# Altium PCB DIPSY_UL1K16.PcbDoc
Units mm, origin at the board's own origin, x right, y up, seen from the top; angles counter-clockwise.
Board outline 10.2 x 10.53 mm, 4 copper layers (L 01 (Top), L 02 GND, L 03 PWR, L 04 (Bot)), stack 0.813 mm thick; 8 components, 14 nets, 39 pads, 11 vias.
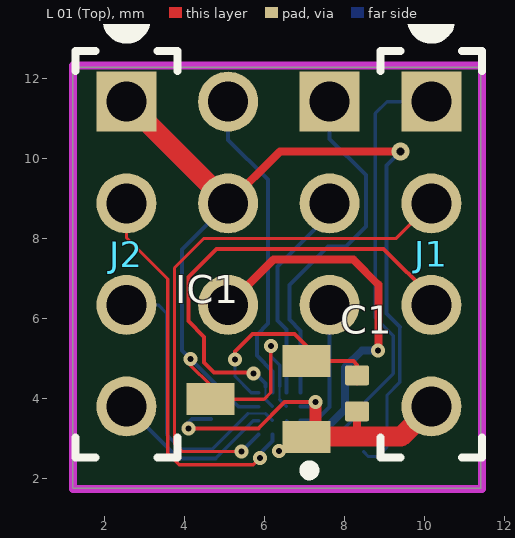
[diagram p0: L 01 (Top) view]
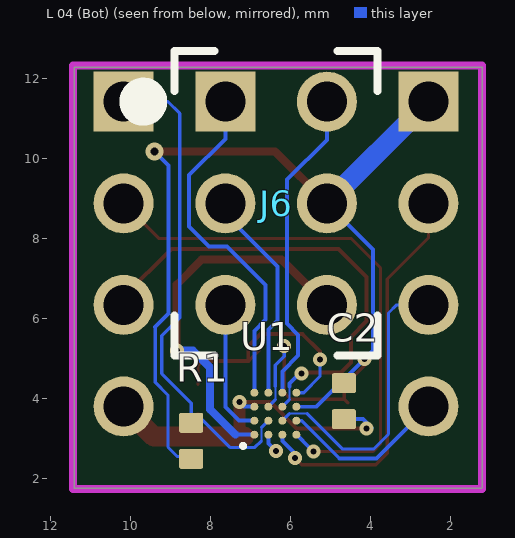
[diagram p1: L 04 (Bot) view, seen from below]
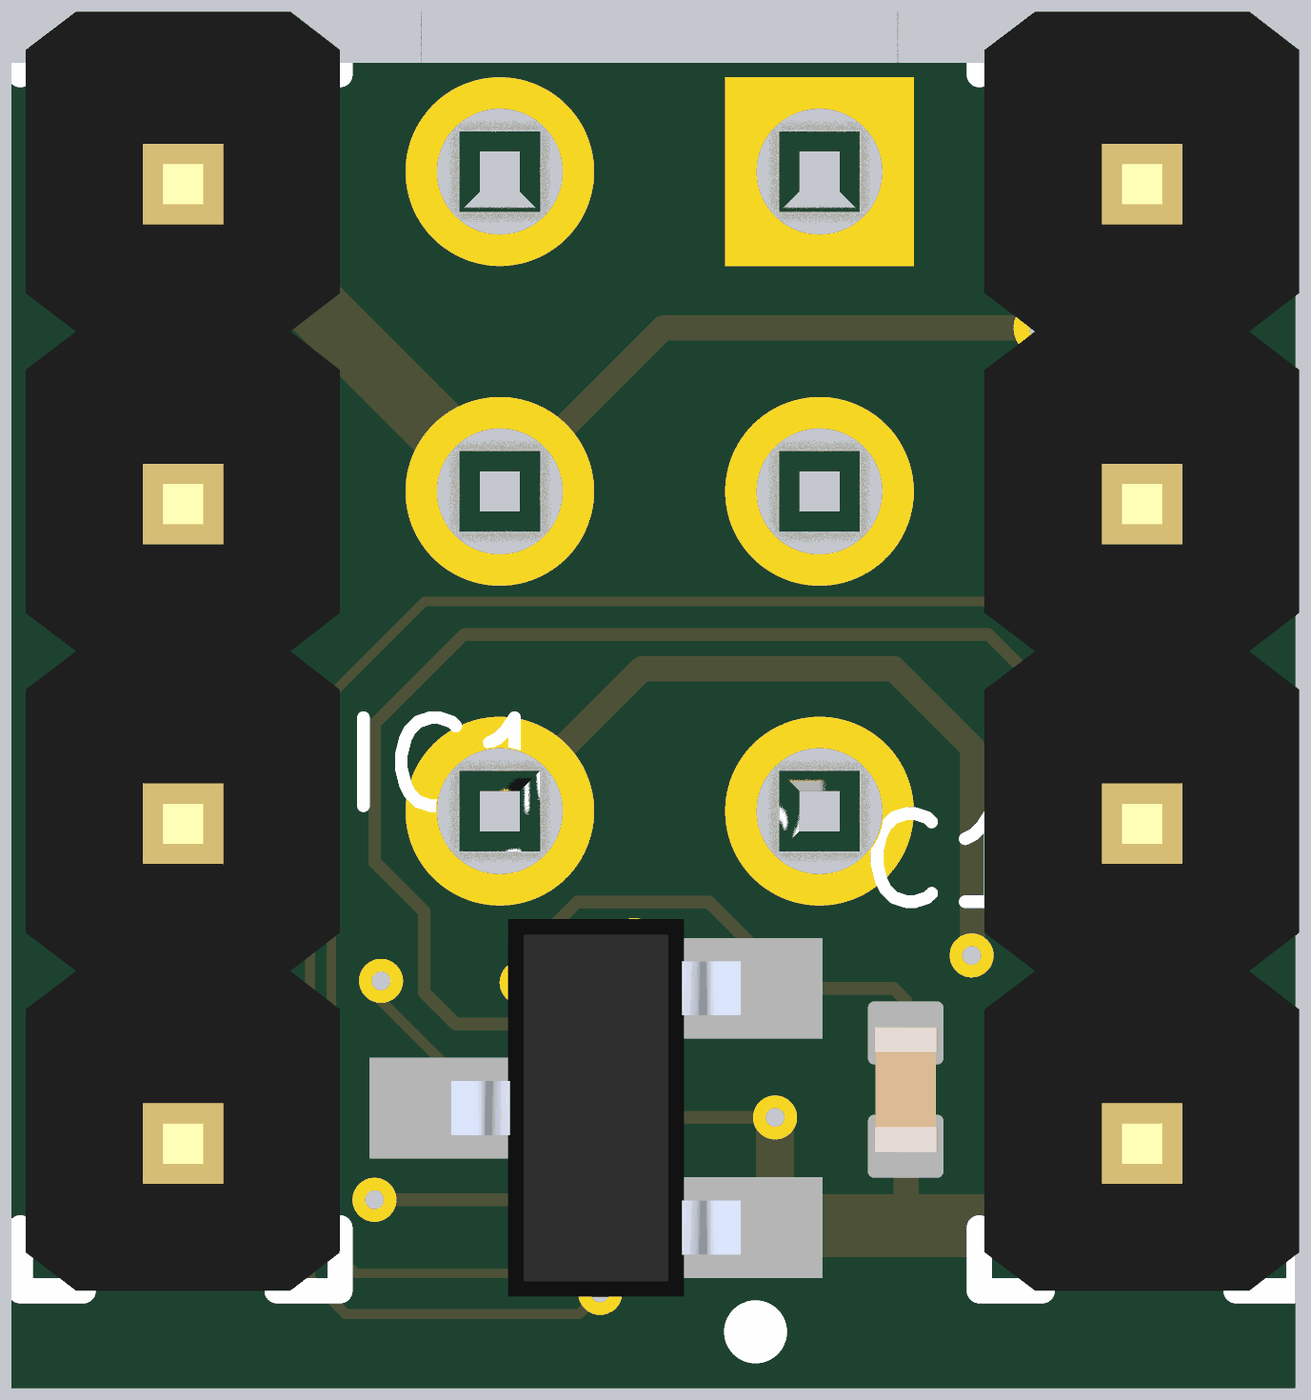
[diagram p2: 3D render of the assembled board from above, using the file's embedded part models]
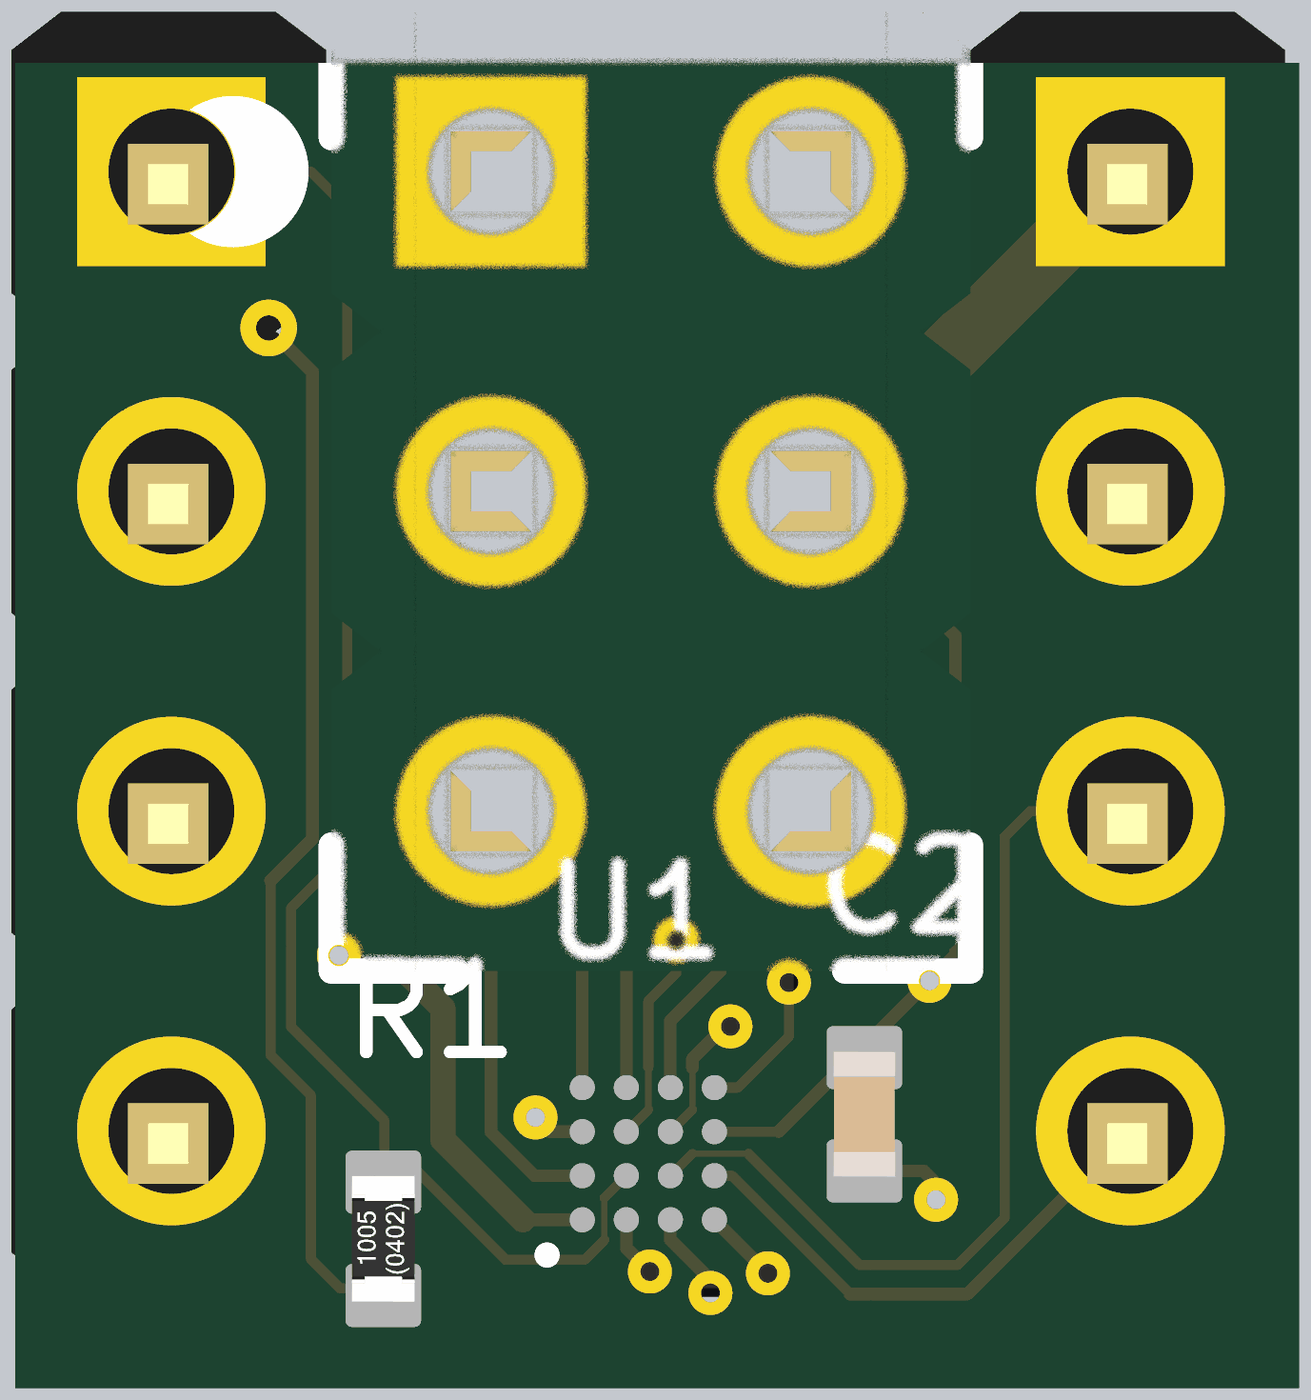
[diagram p3: 3D render of the assembled board from below, using the file's embedded part models]

## Layer stack, top to bottom
Top Solder: solder mask 0.0102, Solder Resist, Dk 3.5
L 01 (Top): signal copper 0.054
Dielectric1: core 0.254, FR-4, Dk 4.2
L 02 GND: signal copper 0.035
Dielectric2: prepreg 0.127, FR-4, Dk 4.2
L 03 PWR: signal copper 0.035
Dielectric5: core 0.254, FR-4, Dk 4.2
L 04 (Bot): signal copper 0.054
Bottom Solder: solder mask 0.0102, Solder Resist, Dk 3.5

## Board outline
1.2,1.766 11.4,1.766 11.4,12.295 1.2,12.295

## Design rules (kind name [scope] priority, off if disabled: settings)
Clearance Clearance_DiffPair [(InDifferentialPairClass('All Differential Pairs')) vs (InPolygon)] p1: gap=0.4
Clearance Clearance_PolyToPoly [InPoly vs InPoly] p2: gap=0.3
Clearance Clearance_Polygon [(InPolygon)] p3: gap=0.15
Clearance [All] p4: gap=0.05
ComponentClearance ComponentClearance_logo [(HasFootprint('LOGO PRINT') or HasFootprint('FIDU-DOT - small'))] p1: gap=-0.05 collisioncheckmode=3 verticalgap=-0.1 showdistances=FALSE
ComponentClearance [All] p2: gap=-0.05 collisioncheckmode=3 verticalgap=0.254 showdistances=FALSE
DiffPairsRouting [All] p1: maxlimit=1 minlimit=0.11 mostfreqgap=1 toplayer_maxgap=0.145 toplayer_prefgap=0.145 toplayer_minwidth=0.11 toplayer_maxwidth=0.381 toplayer_prefwidth=0.381 midlayer1_minwidth=0.11 midlayer1_maxwidth=0.381 midlayer1_prefwidth=0.381 midlayer6_maxgap=0.191 midlayer6_prefgap=0.19 midlayer6_minwidth=0.11 midlayer6_maxwidth=0.381 midlayer6_prefwidth=0.381 bottomlayer_maxgap=0.145 bottomlayer_prefgap=0.145 bottomlayer_minwidth=0.11 bottomlayer_maxwidth=0.381 bottomlayer_prefwidth=0.381 maxuncoupledlength=47.5
FabricationTestPointUsage TestPointUsage [All] p1: valid=0 allowmultiple=FALSE
FabricationTestpoint Testpoint [All] p1: side=3 testpointundercomponent=TRUE minsize=1.016 maxsize=2.54 preferedsize=1.524 minholesize=0 maxholesize=1.016 preferedholesize=0.813 testpointgrid=0.025 allowsidetop=TRUE allowsidebottom=TRUE usegrid=TRUE gridtolerance=0
HoleSize [All] p1: absolutevalues=TRUE maxlimit=5 minlimit=0.15 maxpercent=80.000 minpercent=20.000
MinimumAnnularRing [All] p1: minimumring=0.074
PlaneClearance [All] p1: clearance=0.4
PlaneConnect [All] p1: planeconnectstyle=Direct reliefexpansion=0.508 reliefentries=4 reliefconductorwidth=0.254 reliefairgap=0.254
PolygonConnect PolygonConnect_5 [InPadClass('pad') or IsVia] p1: connectstyle=Direct reliefconductorwidth=0.254 reliefentries=4 polygonreliefangle="90 Angle" airgapwidth=0.254
PolygonConnect PolygonConnect_4 [HasFootprint('MHole3_2mm')] p2: connectstyle=Direct reliefconductorwidth=0.254 reliefentries=4 polygonreliefangle="90 Angle" airgapwidth=0.254
PolygonConnect PolygonConnect_3 [(InComponentClass('All Components'))] p3: connectstyle=Relief reliefconductorwidth=0.15 reliefentries=4 polygonreliefangle="90 Angle" airgapwidth=0.2
RoutingCorners [All] p1: cornerstyle=Round minsetback=2 maxsetback=2
RoutingVias [All] p1: holewidth=0.3 width=0.6 viastyle="Through Hole" minholewidth=0.15 minwidth=0.3 maxholewidth=1 maxwidth=3
SMDNeckDown [All] p1: percent=80.000
SilkToSilkClearance [All] p1: silktosilkclearance=0.1
SilkToSolderMaskClearance SilkscreenOverComponentPads [IsPad] p1: minsilkscreentomaskgap=0.1 clearancetoexposedcopper=TRUE
SolderMaskExpansion SolderMaskExpansion_VIA [(IsVia)] p1: expansion=-0.125
SolderMaskExpansion [All] p2: expansion=0
UnpouredPolygon [All] p1: allowunpoured=FALSE
Width [All] p1: maxlimit=3 minlimit=0.05 preferedwidth=0.2 toplayer_prefwidth=0.08 midlayer1_minwidth=0.11 midlayer6_minwidth=0.11 bottomlayer_prefwidth=0.08 minimp=50.000000 maximp=50.000000 favimp=50.000000 checkconnectedcopper=TRUE
19 further rules are at their usual default settings.

## Components (designator, comment, footprint, x,y, rotation, side; value= is the part's Value field where it differs from the comment)
C1 "1µF" CAPC1005X55N 8.305,4.138 r90 top
C2 "1µF" CAPC1005X55N 4.653,3.942 r270 bottom
IC1 "VREG-SOT23-3-MC" SOT23 5.844,3.992 r180 top locked
J1 "Pin Header 2.54 1Row 4Pins" "STIFTLEISTE2_54 OG 1R-4" 10.16,7.62 r90 top locked
J2 "Pin Header 2.54 1Row 4Pins" "STIFTLEISTE2_54 OG 1R-4" 2.54,7.62 r90 top locked
J6 "Pin Header 2.54 2Row 6Pins" "STIFTLEISTE2_54 OG 2R-6" 6.35,8.89 r270 bottom locked
R1 "10K" RESC1005X40N 8.476,2.953 r90 bottom
U1 "UL1K" BGA16C35P4X4_140X140X100 6.37,3.629 r90 bottom locked

## Footprints (in the part's own frame and the unit in brackets; to place one, negate y for a bottom-side part, rotate by r counter-clockwise, add the part's x,y. Pads: shape width x height; smd on the part's side, far side on the other; paste and mask are expansions set on the pad)
BGA16C35P4X4_140X140X100 [mm] "BGA, 16-Leads, Body 1.40x1.40mmx1.00mm, Pitch 0.35mm"
  round 0.2 smd: A1(-0.525,0.525) A2(-0.175,0.525) A3(0.175,0.525) A4(0.525,0.525) B1(-0.525,0.175) B2(-0.175,0.175) B3(0.175,0.175) B4(0.525,0.175) C1(-0.525,-0.175) C2(-0.175,-0.175) C3(0.175,-0.175) C4(0.525,-0.175) D1(-0.525,-0.525) D2(-0.175,-0.525) D3(0.175,-0.525) D4(0.525,-0.525)
  silkscreen extent -0.85,0.76 -0.76,0.85, body extent -0.7,-0.7 0.7,0.7, height 1
CAPC1005X55N [mm] "Vishay VJ0402 1 x 0.5mm (+/- 0.05), 0.25mm +0.05/-0.1mm Kontakte"
  rrect20% 0.5x0.6 smd: 1(-0.45,0) 2(0.45,0)
  body extent -0.5,-0.25 0.5,0.25, height 0.5
RESC1005X40N [mm] "Vishay D0402 1 x 0.5mm (+/- 0.05), 0.2mm +/-0.1mm Kontakte"
  rrect20% 0.5x0.6 smd: 1(-0.45,0) 2(0.45,0)
  body extent -0.5,-0.25 0.5,0.25, height 0.35
SOT23 [mm] "SOT23 MMBT3904"
  rect 1.2x0.8 smd: 1(-1.2,0.95) 2(-1.2,-0.95) 3(1.2,0)
  silkscreen extent -1.39,1.65 -1.14,1.9, body extent -1.15,-1.5 1.15,1.5, height 1.1
"STIFTLEISTE2_54 OG 1R-4" [mm]
  rect 1.5x1.5 hole 1: 1(3.81,0)
  round 1.5 hole 1: 2(1.27,0) 3(-1.27,0) 4(-3.81,0)
  silkscreen extent -5.08,-1.27 6.16,1.27, body extent -5.08,-1.27 5.08,1.23, height 8.2
"STIFTLEISTE2_54 OG 2R-6" [mm]
  rect 1.5x1.5 hole 1: 1(-2.54,-1.27)
  round 1.5 hole 1: 2(-2.54,1.27) 3(0,-1.27) 4(0,1.27) 5(2.54,-1.27) 6(2.54,1.27)
  silkscreen extent -3.81,-3.62 3.81,2.54, body extent -3.81,-2.54 3.81,2.54, height 8.5

## Part data
C1 C2: library part 23453, "KON 1µF 6.3V X5R SMD 10%"
J1 J2: library part 23162, "Stiftleiste gerade 1-reihig, 4pol."
J6: library part 22334, "Stiftleiste gerade 2-reihig, 6pol."
R1: library part 22750, "WID SMD 10K 1% 0,063W"

## Via types
v1: diameter 0.35, hole 0.15, L 01 (Top) to L 04 (Bot), 10 vias
v2: diameter 0.45, hole 0.2, L 01 (Top) to L 04 (Bot), 1 vias

## Nets (pads, with @x,y where several pads share a name; then routed paths per layer and width w, separated by ;. In a path a pad name is that pad's centre, name@x,y a point inside that pad or via, vN(x,y) a via of type N, cw(c..) or ccw(c..) an arc to the next point about the centre after c; other vN are vias at no path point)
BARCODE: J6.5 U1.A2 | length 3.4
  L 04 (Bot) w0.1: U1.A2 7.275,3.454 7.62,3.799 J6.5
CDONE: J1.3 U1.C3 | length 11.8
  L 01 (Top) w0.1: v1(5.718,4.64) 5.699,4.659 4.73,4.659 4.479,4.91 4.479,5.552 4.086,5.945 4.086,7.045 4.793,7.752 8.965,7.752 10.16,6.557 J1.3
  L 04 (Bot) w0.05: 6.02,3.979 6.02,4.313
  L 04 (Bot) w0.075: 6.02,3.979 U1.C3
  L 04 (Bot) w0.1: v1(5.718,4.64) 5.718,4.683 6.02,4.381 6.02,4.313
CRESETB: J1.1 R1.2 U1.B2 | length 12.3
  L 04 (Bot) w0.05: 6.72,2.945 6.72,3.279
  L 04 (Bot) w0.075: U1.B2 6.72,3.279
  L 04 (Bot) w0.08: 6.72,2.945 6.879,2.786 7.505,2.786 8.298,3.579 8.469,3.579 8.469,3.893 9.208,4.632 9.208,5.58 8.761,6.027 8.761,11.138 9.053,11.43 J1.1
GND: C1.1 C2.2 IC1.1 J1.4 U1.A3 U1.B1 | length 11.9
  L 01 (Top) w0.1: v1(4.084,3.263) 5.834,3.263 6.488,3.917 v1(7.267,3.917) ; IC1.1@7.267,3.265 7.075,2.989 8.307,3.139 ; J1.4@9.915,3.565 J1.4
  L 01 (Top) w0.2: 8.307,3.139 C1.1@8.307,3.565
  L 01 (Top) w0.3: IC1.1@7.267,3.265 v1(7.267,3.917)
  L 01 (Top) w0.5: IC1.1@7.147,3.057 9.407,3.057 J1.4
  L 04 (Bot) w0.1: v1@3.964,3.273 4.183,3.492 C2.2 ; v1(6.358,2.693) 6.545,2.88 U1.B1 ; U1.A3 7.154,3.804 v1(7.267,3.917) ; J1.4 J1.4@10.16,4.258
IRLED: J6.6 U1.A1 | length 9.7
  L 01 (Top) w0.08: J6.6@5.001,6.271 J6.6
  L 01 (Top) w0.2: J6.6 6.212,7.482 8.209,7.482 8.835,6.856 8.835,5.21 v1(8.829,5.204)
  L 04 (Bot) w0.1: U1.A1 7.367,3.104
  L 04 (Bot) w0.2: 7.367,3.104 8.003,3.74 8.003,4.785 8.422,5.204 v1(8.829,5.204)
RGB0: J6.3 U1.B4 | length 5.4
  L 04 (Bot) w0.1: U1.B4 6.545,5.732 6.315,5.962 6.315,7.308 7.62,8.613 J6.3
RGB1: J6.1 U1.A4 | length 8.8
  L 04 (Bot) w0.1: U1.A4 6.895,5.697 6.611,5.981 6.611,6.845 7.581,7.815 8.029,7.815 8.525,8.311 8.525,9.596 7.62,10.501 J6.1
RGB2: J6.2 U1.C4 | length 8
  L 04 (Bot) w0.1: J6.2 5.08,10.478 6.076,9.482 6.076,5.879 5.799,5.602 5.799,5.08 6.195,4.684 U1.C4
SCK: J2.2 U1.C1 | length 9.9
  L 01 (Top) w0.08: J2.2 2.54,8.03 3.572,6.998 3.572,2.637 3.855,2.354 5.708,2.354 v1(5.877,2.523)
  L 04 (Bot) w0.08: v1(5.877,2.523) v1@5.877,2.629
  L 04 (Bot) w0.1: v1@5.877,2.629 6.195,2.947 U1.C1
SI: J2.4 U1.D2 | length 4.2
  L 04 (Bot) w0.08: 4.768,2.514 5.708,3.454 U1.D2
  L 04 (Bot) w0.1: J2.4 3.836,2.514 4.768,2.514
SO: J2.3 U1.C2 | length 7.4
  L 04 (Bot) w0.05: 5.573,3.629 6.02,3.629
  L 04 (Bot) w0.075: 6.02,3.629 U1.C2
  L 04 (Bot) w0.08: J2.3 3.337,6.35 3.539,6.148 3.539,3.119 3.914,2.744 4.688,2.744 5.573,3.629
SS: J1.2 U1.D1 | length 13.7
  L 01 (Top) w0.075: v1(5.42,2.679) 3.934,2.679 3.741,2.872 3.741,7.277 4.479,8.015 9.285,8.015 J1.2
  L 04 (Bot) w0.1: v1@5.496,2.755 U1.D1
VCC: C1.2 IC1.2 U1.D4 | length 6.1
  L 01 (Top) w0.08: v1(5.253,4.988) v1@5.253,5.062 ; IC1.2@6.769,5.217 IC1.2 IC1.2@7.044,5.326 ; C1.2@8.305,4.362 8.305,4.847
  L 01 (Top) w0.1: v1(5.253,4.988) 5.253,5.185 5.696,5.628 6.742,5.628 IC1.2@7.044,5.326 ; IC1.2 8.21,4.942 8.305,4.847
  L 04 (Bot) w0.08: v1(5.253,4.988) 5.253,4.562 5.661,4.154 U1.D4
VIN: C2.1 IC1.3 J2.1 J6.4 R1.1 U1.B3 U1.D3 | length 33
  L 01 (Top) w0.08: v1(4.136,5.002) 4.136,4.846 4.644,4.338 IC1.3 ; IC1.3@4.555,3.903 IC1.3 ; v1(6.148,5.326) 6.148,4.16 5.98,3.992 IC1.3
  L 01 (Top) w0.2: J6.4 6.378,10.188 v2(9.387,10.188)
  L 01 (Top) w0.5: J2.1@2.522,11.448 J6.4
  L 04 (Bot) w0.05: 6.37,3.979 6.37,4.313
  L 04 (Bot) w0.075: 6.37,3.979 U1.B3
  L 04 (Bot) w0.08: 5.334,3.804 U1.D3 ; v1(6.148,5.326) 6.148,5.062 6.37,4.84 6.37,4.313 ; R1.1@8.469,2.679 8.59,2.558 8.815,2.558 9.052,2.795 9.052,4.093 9.372,4.413 9.372,5.798
  L 04 (Bot) w0.1: J6.4 3.93,7.74 3.93,5.208 v1(4.136,5.002) 5.334,3.804 ; 9.372,5.798 9.038,6.132 9.038,9.839 v2(9.387,10.188)
  L 04 (Bot) w0.5: J2.1 J6.4

## Keep-outs
Keep-Out Layer:
  lines w0.2: 1.2,1.746 1.2,12.34 11.43,12.34 11.43,1.746 1.2,1.746

## Silkscreen, mask and mechanical layers (free items; w line width, h text height)
Mechanical 6:
  the board outline again, w0.1

## Dimensions
1.2,12.295 to 1.2,1.766 on Dimension

## Text inside footprints (layer, text, board x,y; h text height)
J1: 13TopAssy "1" at 10.91,13.06 h1.52 r90; 13TopAssy "4" at 10.91,1.23 h1.52 r90
J2: 13TopAssy "1" at 3.29,13.06 h1.52 r90; 13TopAssy "4" at 3.29,1.23 h1.52 r90
J6: 14BottomAssy "5" at 8.75,5.89 h1 r90; 14BottomAssy "6" at 4.925,5.89 h1 r90; 14BottomAssy "2" at 4.95,12.565 h1 r90; 14BottomAssy "1" at 8.61,12.425 h1 r90